# Altium PCB yasaman_najafi_shahrestanaki.PcbDoc
Units mm, origin at the board's own origin, x right, y up, seen from the top; angles counter-clockwise.
Board outline 94.07 x 58.64 mm, 2 copper layers (Top Layer, Bottom Layer); 28 components, 23 nets, 118 pads, 12 vias.
Unrouted connection lines stored in the file: 1.
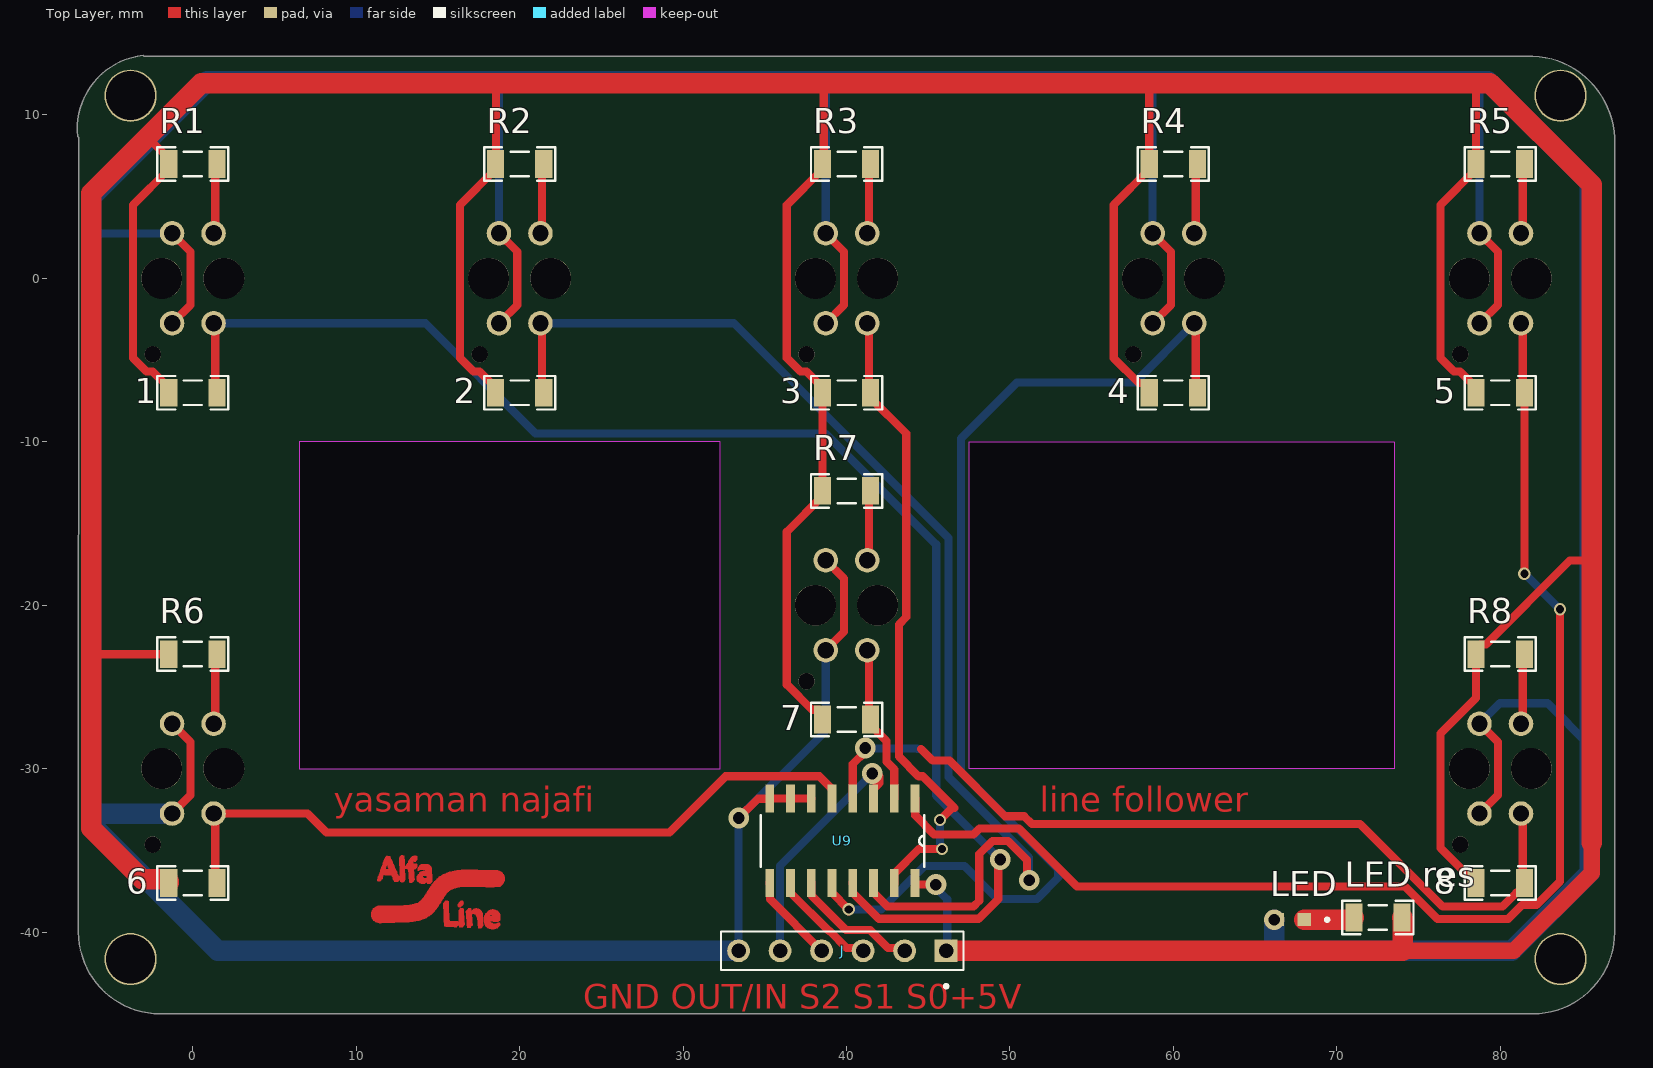
[diagram p0: Top Layer view]
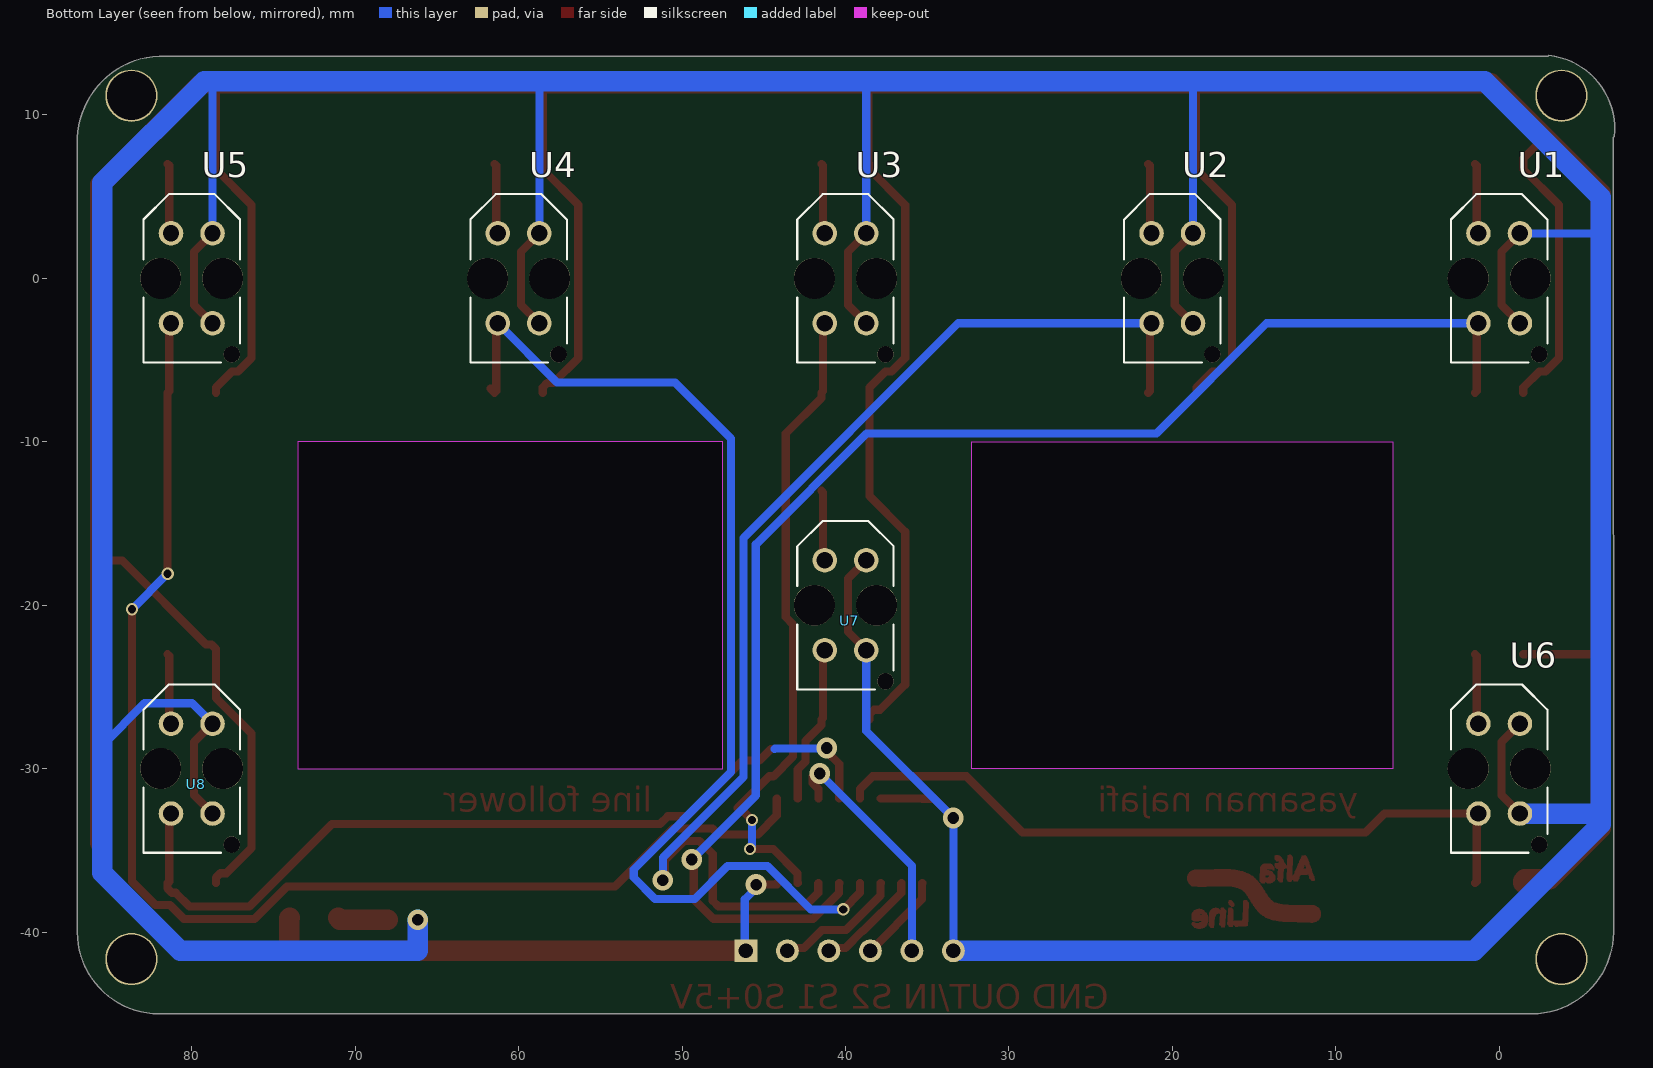
[diagram p1: Bottom Layer view, seen from below]
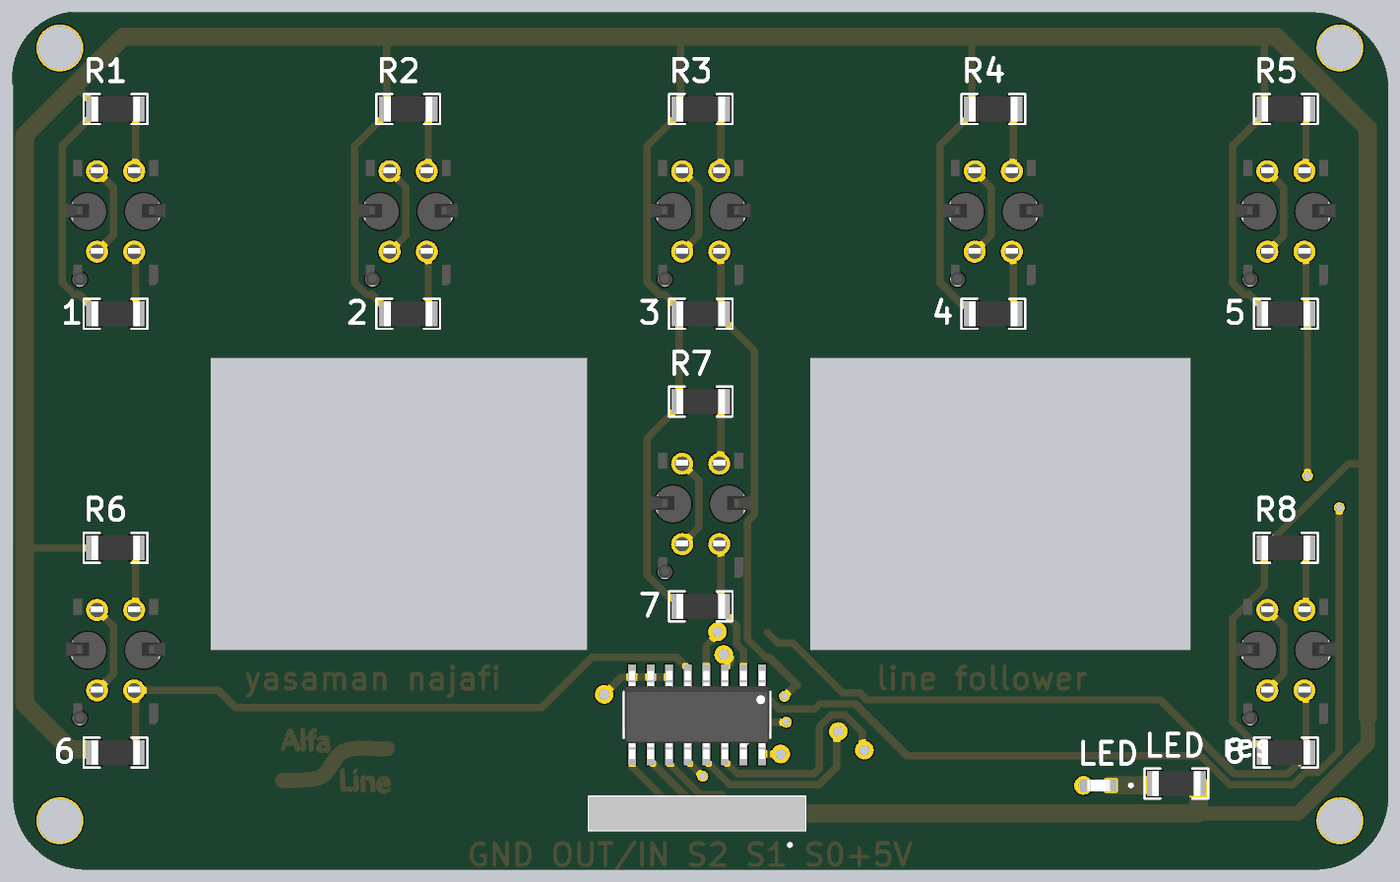
[diagram p2: 3D render of the assembled board from above, using the file's embedded part models]
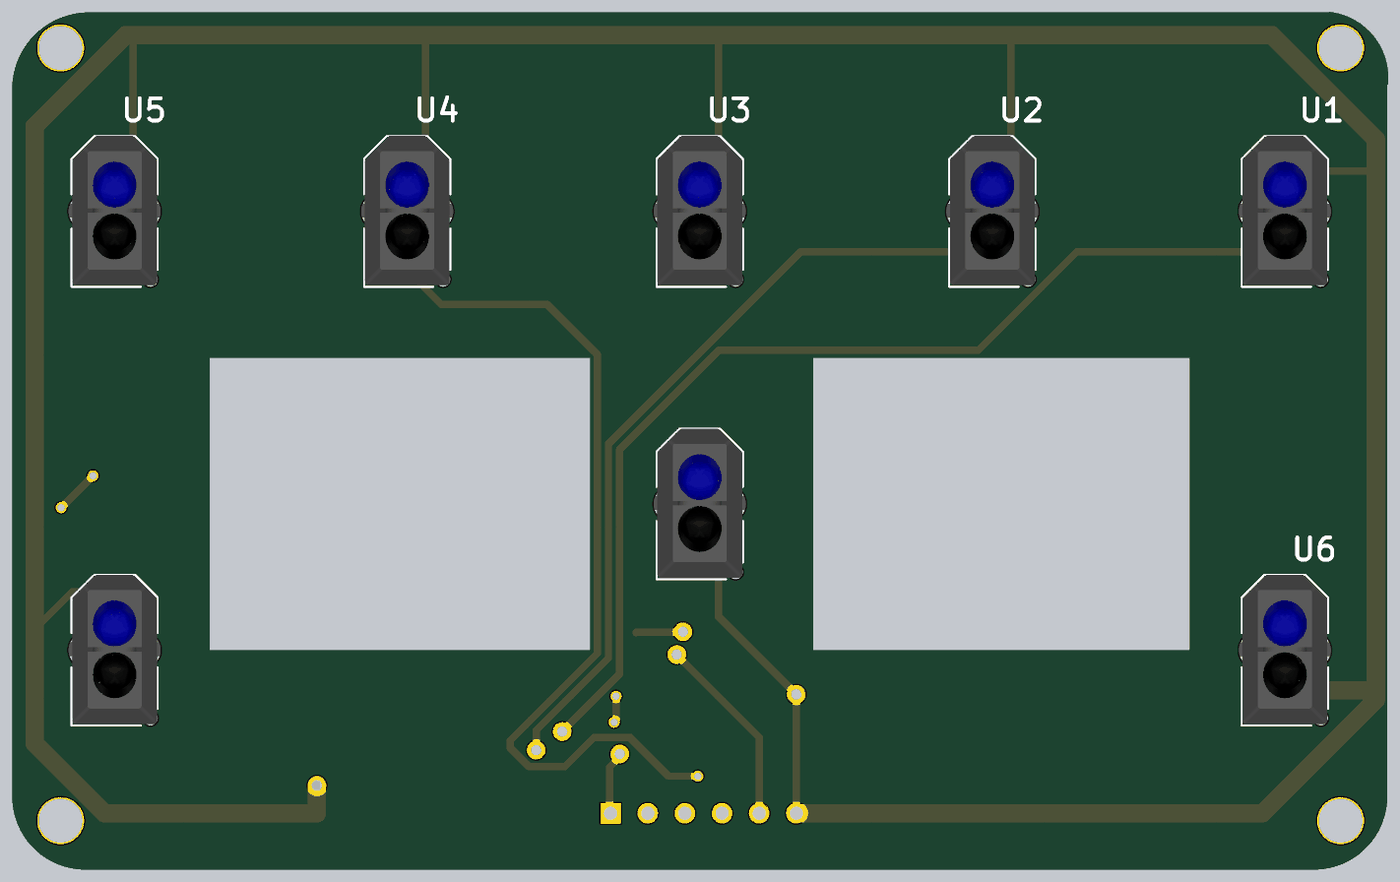
[diagram p3: 3D render of the assembled board from below, using the file's embedded part models]

## Layer stack, top to bottom
Top Solder: solder mask 0.0102, Solder Resist, Dk 3.5
Top Layer: signal copper 0.0356
Dielectric 1: dielectric 0.32, FR-4, Dk 4.8
Bottom Layer: signal copper 0.0356
Bottom Solder: solder mask 0.0102, Solder Resist, Dk 3.5

## Board outline
-7,-40 -6.985,8.636 -7.043,8.675 cw(c-2.54,9.144) -3.04,13.644 -3,13.603 82,13.603 cw(c81.759,8.362) 87,8.603 87,-40.005 87,-40 cw(c82,-40) 82,-45 -2,-45 cw(c-2,-40)
cut-out: 47.498,-10 73.5,-10 73.5,-30 47.498,-30
cut-out: 6.5,-30 32.258,-30 32.258,-10 6.5,-10

## Design rules (kind name [scope] priority, off if disabled: settings)
Clearance [All] p1: gap=0.254 ignorepadtopadclearanceinfootprint=FALSE except(0: Arc-Hole Track-Hole SMDPad-Hole THPad-Hole Via-Hole Fill-Hole Poly-Hole Region-Hole Text-Hole)
PolygonConnect [All] p1: connectstyle=Relief reliefconductorwidth=0.254 reliefentries=4 polygonreliefangle="90 Angle" airgapwidth=0.254
RoutingVias [All] p1: holewidth=0.711 width=1.27 viastyle="Through Hole" minholewidth=0.711 minwidth=1.27 maxholewidth=0.711 maxwidth=1.27
SolderMaskExpansion [All] p1: expansion=0.102 istentingtop=FALSE
Width [All] p1: maxlimit=1.25 minlimit=0.5 preferedwidth=1
30 further rules are at their usual default settings.

## Components (designator, comment, footprint, x,y, rotation, side; value= is the part's Value field where it differs from the comment)
1 "1K" RES1206 0,-7 r180 top
2 "1K" RES1206 20,-7 r180 top
3 "1K" RES1206 40,-7 r180 top
4 "1K" RES1206 60,-7 r180 top
5 "1K" RES1206 80,-7 r180 top
6 "1K" RES1206 0,-37 r180 top
7 "1K" RES1206 40,-27 r180 top
8 "1K" RES1206 80,-37 r180 top
J "103321-6" TE_103321-6 39.746,-41.148 r180 top
LED "" LED_KPT-1608ZGC 67.183,-39.243 r180 top
"LED res" "1K" RES1206 72.517,-39.116 r0 top
R1 "1K" RES1206 0,7 r0 top
R2 "1K" RES1206 20,7 r0 top
R3 "1K" RES1206 40,7 r0 top
R4 "1K" RES1206 60,7 r0 top
R5 "1K" RES1206 80,7 r0 top
R6 "1K" RES1206 0,-23 r0 top
R7 "1K" RES1206 40,-13 r0 top
R8 "1K" RES1206 80,-23 r0 top
U1 "TCRT5000" OPTO_TCRT5000 0,0 r90 bottom
U2 "TCRT5000" OPTO_TCRT5000 20,0 r90 bottom
U3 "TCRT5000" OPTO_TCRT5000 40,0 r90 bottom
U4 "TCRT5000" OPTO_TCRT5000 60,0 r90 bottom
U5 "TCRT5000" OPTO_TCRT5000 80,0 r90 bottom
U6 "TCRT5000" OPTO_TCRT5000 0,-30 r90 bottom
U7 "TCRT5000" OPTO_TCRT5000 40,-20 r90 bottom
U8 "TCRT5000" OPTO_TCRT5000 80,-30 r90 bottom
U9 "74HC4051D" SOIC127P600X175-16N 39.746,-34.417 r270 top

## Footprints (in the part's own frame and the unit in brackets; to place one, negate y for a bottom-side part, rotate by r counter-clockwise, add the part's x,y. Pads: shape width x height; smd on the part's side, far side on the other; paste and mask are expansions set on the pad)
LED_KPT-1608ZGC [mm]
  rect 0.8x0.8 smd: 1(0.825,0) 2(-0.825,0)
  silkscreen extent -2.32,-0.1 -2.13,0.1, body extent -0.8,-0.4 0.8,0.4, height 1.1
OPTO_TCRT5000 [mm]
  round 1.5 hole 1: A(2.75,1.27) CATH(2.75,-1.27) COLL(-2.75,1.27) E(-2.75,-1.27)
  round 1 hole 1 unplated: ""(-4.65,-2.45)
  round 2.5 hole 2.5 unplated: ""(0,-1.9) ""(0,1.9)
  silkscreen extent -5.15,-2.95 5.15,2.95, body extent -5.04,-3.4 5.16,3.4, height 6.7
RES1206 [mm] "Chip Resistor, 2-Leads, Body 3/20x1/60mm, IPC Medium Density DESIGNER:ABBAS BASEREH"
  rect 1.05x1.7 smd: 1(-1.475,0) 2(1.475,0)
  silkscreen extent -2.17,-1.02 2.17,1.02, body extent -1.65,-0.85 1.65,0.85, height 0.94
SOIC127P600X175-16N [mil]
  rect 67x21 smd: 1(-102,175) 2(-102,125) 3(-102,75) 4(-102,25) 5(-102,-25) 6(-102,-75) 7(-102,-125) 8(-102,-175) 9(102,-175) 10(102,-125) 11(102,-75) 12(102,-25) 13(102,25) 14(102,75) 15(102,125) 16(102,175)
  silkscreen extent -62,-197 62,197, body extent -118,-195 118,195, height 69
TE_103321-6 [mm]
  rect 1.398x1.398 hole 0.89: 1(-6.35,0)
  round 1.398 hole 0.89: 2(-3.81,0) 3(-1.27,0) 4(1.27,0) 5(3.81,0) 6(6.35,0)
  silkscreen extent -7.42,-1.17 7.42,2.27, body extent -7.42,-1.17 7.42,1.17, height 10.58

## Part data
1 2 3 4 5 6 7 8 "LED res" R1 R2 R3 R4 R5 R6 R7 R8: library part "RES SMD PACKAGE", "TOTAL SMD RESISTOR PACK", Data=2017-3-10, Desc.="RES SMD PAKAGES", Designer="Abbas Basereh"
J: "Pin 06 MODII HDR SRST B / A .100CL 6 POS", Package=None, Availability=Unavailable, MF="TE Connectivity", Mouser-Purchase-URL=https://snapeda.com/shop?store=Mouser&id=4238467, MP=103321-6, Price=None, SnapEDA_Link=https://www.snapeda.com/parts/103321-6/TE%20Connectivity/view-part/4238467/?ref=snap
LED: library part KPT-1608ZGC, "1.6x0.8mm Smd Chip Led Lamp", Package="0603 Kingbright", Availability="In Stock", Check_prices=https://www.snapeda.com/parts/KPT-1608ZGC/Kingbright/view-part/?ref=eda, MF=Kingbright, MP=KPT-1608ZGC, Price=None, SnapEDA_Link=https://www.snapeda.com/parts/KPT-1608ZGC/Kingbright/view-part/?ref=snap
U1 U2 U3 U4 U5 U6 U7 U8: "950 nm 60 mA Through Hole Reflective Optical Sensor with Transistor Output", Package=None, Availability=Unavailable, MP=TCRT5000, Price=None
U9: "1 Circuit IC Switch 8:1 130Ohm 16-SOIC", Package="SOIC-16 Toshiba", Availability="In Stock", Check_prices=https://www.snapeda.com/parts/74HC4051D/Toshiba/view-part/?ref=eda, MF=Toshiba, MP=74HC4051D, Price=None, Purchase-URL=https://pricing.snapeda.com/search/part/74HC4051D/?ref=eda, SnapEDA_Link=https://www.snapeda.com/parts/74HC4051D/Toshiba/view-part/?ref=snap

## Free pads (board coordinates)
  round 3.2 hole 3: 7(-3.81,11.176) 8(83.693,11.176) 9(83.693,-41.656) 10(-3.81,-41.656)

## Via types
v1: diameter 1.27, hole 0.711, Top Layer to Bottom Layer, 7 vias
v2: diameter 0.75, hole 0.5, Top Layer to Bottom Layer, 5 vias

## Nets (pads, with @x,y where several pads share a name; then routed paths per layer and width w, separated by ;. In a path a pad name is that pad's centre, name@x,y a point inside that pad or via, vN(x,y) a via of type N, cw(c..) or ccw(c..) an arc to the next point about the centre after c; other vN are vias at no path point)
0: 1.1 U1.COLL U9.13 | length 88.2
  Top Layer w0.5: U1.COLL 1.373,-2.853 1.373,-6.898 1.1 ; U9.13 40.398,-37.025 40.398,-37.609 41.98,-39.191 48.083,-39.191 49.288,-37.986 49.288,-35.675 v1(49.403,-35.56)
  Bottom Layer w0.5: U1.COLL 14.23,-2.75 20.976,-9.496 38.706,-9.496 45.486,-16.276 45.486,-31.643 v1(49.403,-35.56)
1: 2.1 U2.COLL U9.14 | length 73.2
  Top Layer w0.5: U2.COLL 21.373,-2.853 21.373,-6.898 2.1 ; U9.14 41.668,-37.025 41.668,-37.609 42.496,-38.437 47.771,-38.437 48.121,-38.087 48.121,-35.231 48.931,-34.421 49.875,-34.421 51.034,-35.58 51.034,-36.683 v1(51.181,-36.83)
  Bottom Layer w0.5: U2.COLL 33.103,-2.75 46.24,-15.887 46.24,-30.521 51.164,-35.445 51.164,-36.813 v1(51.181,-36.83)
2: 3.1 U3.COLL U9.15 | length 39.5
  Top Layer w0.5: U3.COLL 41.372,-2.852 41.372,-6.897 3.1 41.475,-7.325 43.654,-9.504 43.654,-20.727 43.208,-21.173 43.208,-29.265 44.414,-30.471 44.666,-30.471 46.609,-32.414 46.453,-32.414 v2(45.72,-33.147) ; U9.15 42.938,-36.991 42.938,-36.407 44.42,-34.925 v2(45.847,-34.925)
  Bottom Layer w0.5: v2(45.72,-33.147) 45.72,-34.73 45.847,-34.857 v2(45.847,-34.925)
3: 4.1 U4.COLL U9.12 | length 68.7
  Top Layer w0.5: U9.12 39.111,-37.592 v2(40.132,-38.613) v2@40.132,-38.735 ; U4.COLL 61.372,-2.852 61.372,-6.897 4.1 61.475,-6.978 4.1@61.722,-6.731
  Bottom Layer w0.5: v2(40.132,-38.613) 42.122,-38.613 44.778,-35.957 47.209,-35.957 49.221,-37.969 51.653,-37.969 52.953,-36.669 52.953,-36.168 46.994,-30.209 46.994,-9.791 50.419,-6.366 57.654,-6.366 U4.COLL
4: 5.1 U5.COLL U9.1 | length 79.5
  Top Layer w0.5: U9.1 44.208,-31.843 44.208,-32.878 45.356,-34.026 47.777,-34.026 48.136,-33.667 50.557,-33.667 54.101,-37.211 74.175,-37.211 76.165,-39.201 80.488,-39.201 81.334,-38.354 82.209,-38.354 83.654,-36.909 v2(83.654,-20.253) ; U5.COLL 81.372,-2.852 81.372,-6.897 5.1 v2(81.475,-18.074)
  Bottom Layer w0.5: v2(81.475,-18.074) v2(83.654,-20.253)
5: 6.1 U6.COLL U9.5 | length 45
  Top Layer w0.5: 6.1 1.373,-36.898 1.373,-32.853 U6.COLL 7.018,-32.75 8.173,-33.905 29.158,-33.905 32.592,-30.471 38.34,-30.471 39.111,-31.242 U9.5
6: 7.1 U7.COLL U9.2 | length 9.8
  Top Layer w0.5: U7.COLL 41.372,-22.852 41.372,-26.897 7.1 41.475,-27.325 42.454,-28.304 42.454,-29.577 42.922,-30.045 U9.2
7: 8.1 U8.COLL U9.4 | length 52.7
  Top Layer w0.5: U9.4 40.381,-29.714 41.148,-28.947 v1(41.148,-28.739) ; 44.555,-28.793 45.273,-29.51 46.296,-29.51 49.698,-32.913 50.869,-32.913 51.353,-33.397 71.427,-33.397 76.477,-38.447 80.133,-38.447 80.979,-37.6 81.2,-37.6 81.475,-37.325 8.1 81.372,-36.897 81.372,-32.852 U8.COLL
  Bottom Layer w0.5: v1(41.148,-28.739) 41.175,-28.766 44.32,-28.766 44.347,-28.793
+5: 1.2 2.2 3.2 4.2 5.2 6.2 7.2 8.2 "LED res.2" J.1 R1.1 R2.1 R3.1 R4.1 R5.1 R6.1 R7.1 R8.1 U9.16 | length 388.2
  Top Layer w0.5: -6.223,-22.987 -6.21,-23 R6.1 ; -2.73,8.7 -2.73,8.581 -1.475,7.325 R1.1 -1.475,6.675 -3.654,4.496 -3.654,-4.866 -2.827,-5.693 -2.457,-5.693 -1.475,-6.675 1.2 ; 2.2 18.525,-6.675 17.543,-5.693 17.173,-5.693 16.346,-4.866 16.346,4.496 18.525,6.675 R2.1 18.542,7.017 18.542,11.938 ; 7.2 38.525,-26.675 38.25,-26.4 37.88,-26.4 36.346,-24.866 36.346,-15.504 38.525,-13.325 R7.1 3.2 38.525,-6.675 37.543,-5.693 37.173,-5.693 36.346,-4.866 36.346,4.496 38.525,6.675 R3.1 38.608,7.083 38.608,11.938 ; U9.16 44.191,-37.079 44.208,-37.096 v1(45.47,-37.096) ; 4.2 58.525,-6.675 58.25,-6.4 57.88,-6.4 56.346,-4.866 56.346,4.496 58.525,6.675 R4.1 58.525,11.916 58.547,11.938 ; 8.2 78.525,-36.675 78.25,-36.4 77.88,-36.4 76.346,-34.866 76.346,-27.861 78.525,-25.682 R8.1 78.525,-22.675 78.8,-22.4 79.125,-22.4 84.253,-17.272 85.598,-17.272 ; 5.2 78.525,-6.675 77.543,-5.693 77.173,-5.693 76.346,-4.866 76.346,4.496 78.525,6.675 R5.1 78.525,11.85 78.613,11.938
  Top Layer w1: 74.041,-41.148 80.835,-41.148 85.598,-36.385 85.598,-34.544
  Top Layer w1.25: 6.2 -1.475,-36.875 -1.575,-36.775 -3.103,-36.775 -6.223,-33.655 -6.223,-22.987 -6.223,5.207 -2.73,8.7 0.508,11.938 18.542,11.938 38.608,11.938 58.547,11.938 78.613,11.938 79.375,11.938 85.598,5.715 85.598,-17.272 85.598,-34.544 ; J.1 74.041,-41.148 74.041,-39.165 73.992,-39.116
  Bottom Layer w0.5: v1(45.47,-37.096) 45.47,-37.304 46.162,-37.996 46.162,-41.082 J.1
GND: J.6 LED.1 U1.CATH U1.E U2.CATH U2.E U3.CATH U3.E U4.CATH U4.E U5.CATH U5.E U6.CATH U6.E U7.CATH U7.E U8.CATH U8.E U9.6 U9.7 U9.8 | length 376.9
  Top Layer w0.5: U6.E -0.146,-31.626 -0.146,-28.374 U6.CATH ; U1.E -0.146,-1.626 -0.146,1.626 U1.CATH ; U2.E 19.854,-1.626 19.854,1.626 U2.CATH ; v1@33.396,-33.025 v1(33.401,-33.02) 34.577,-31.844 35.284,-31.844 U9.8 ; U9.8 U9.7 U9.6 ; U7.E 39.854,-21.626 39.854,-18.374 U7.CATH ; U3.E 39.854,-1.626 39.854,1.626 U3.CATH ; U4.E 59.854,-1.626 59.854,1.626 U4.CATH ; U8.E 79.854,-31.626 79.854,-28.374 U8.CATH ; U5.E 79.854,-1.626 79.854,1.626 U5.CATH
  Bottom Layer w0.5: -6.223,2.667 -6.14,2.75 U1.CATH ; U2.CATH 18.73,11.872 18.923,12.065 ; J.6 33.396,-33.025 v1(33.401,-33.02) 38.73,-27.691 U7.E ; U3.CATH 38.73,12.06 38.735,12.065 ; 58.674,12.065 58.73,12.009 U4.CATH ; 78.232,12.065 78.73,11.567 U5.CATH ; U8.CATH 79.984,-25.996 82.892,-25.996 85.471,-28.575
  Bottom Layer w1.25: U6.E -5.572,-32.75 -6.223,-33.401 ; J.6 1.524,-41.148 -6.223,-33.401 ; v1(66.167,-39.243) 66.167,-41.148 80.695,-41.148 85.471,-36.372 85.471,-28.575 85.471,5.842 79.248,12.065 78.232,12.065 58.674,12.065 38.735,12.065 18.923,12.065 0.889,12.065 -6.223,4.953 -6.223,2.667 -6.223,-33.401
"NetLED res_1": "LED res.1" LED.2 | length 3.1
  Top Layer w1.25: LED.2 70.942,-39.243 71.042,-39.143 71.042,-39.116
NetR1_2: R1.2 U1.A | length 4.3
  Top Layer w0.5: U1.A 1.372,2.852 1.372,6.898 R1.2
NetR2_2: R2.2 U2.A | length 4.3
  Top Layer w0.5: U2.A 21.372,2.852 21.372,6.898 R2.2
NetR3_2: R3.2 U3.A | length 4.3
  Top Layer w0.5: U3.A 41.372,2.852 41.372,6.898 R3.2
NetR4_2: R4.2 U4.A | length 4.3
  Top Layer w0.5: U4.A 61.372,2.852 61.372,6.898 R4.2
NetR5_2: R5.2 U5.A | length 4.3
  Top Layer w0.5: U5.A 81.372,2.852 81.372,6.898 R5.2
NetR6_2: R6.2 U6.A | length 4.3
  Top Layer w0.5: U6.A 1.372,-27.148 1.372,-23.102 R6.2
NetR7_2: R7.2 U7.A | length 4.3
  Top Layer w0.5: U7.A 41.372,-17.148 41.372,-13.102 R7.2
NetR8_2: R8.2 U8.A | length 4.3
  Top Layer w0.5: U8.A 81.372,-27.148 81.372,-23.102 R8.2
out/in: J.5 U9.3 | length 15.2
  Top Layer w0.5: v1(41.571,-30.297) 41.718,-30.444 41.99,-30.444 42.017,-30.471 42.017,-30.876 41.651,-31.242 U9.3
  Bottom Layer w0.5: J.5 35.936,-35.946 41.571,-30.311 v1(41.571,-30.297)
S0: J.2 U9.11 | length 7.9
  Top Layer w0.5: U9.11 37.858,-37.025 37.858,-37.762 39.974,-39.878 41.447,-39.878 42.545,-40.976 43.384,-40.976 J.2
S1: J.3 U9.10 | length 6.5
  Top Layer w0.5: U9.10 36.588,-37.025 36.588,-37.609 38.924,-39.945 38.974,-39.945 40.005,-40.976 40.844,-40.976 J.3
S2: J.4 U9.9 | length 5.5
  Top Layer w0.5: U9.9 35.318,-37.025 35.318,-37.99 J.4
pads on no net: U1. U2. U3. U4. U5. U6. U7. U8.
copper on no net: | length 592.5
  Top Layer w0.025: 10.922,-39.04 14.376,-39.04 ; 10.922,-39.014 14.427,-39.014 ; 10.922,-38.989 14.453,-38.989 ; 10.922,-38.964 14.503,-38.964 ; 10.922,-38.938 14.529,-38.938 ; 10.922,-38.913 14.58,-38.913 ; 10.922,-38.887 14.605,-38.887 ; 10.922,-38.862 14.63,-38.862 ; 10.922,-38.837 14.656,-38.837 ; 10.922,-38.811 14.681,-38.811 ; 10.922,-38.786 14.707,-38.786 ; 10.947,-39.116 14.275,-39.116 ; 10.947,-39.091 14.3,-39.091 ; 10.947,-39.065 14.351,-39.065 ; 10.947,-38.76 14.732,-38.76 ; 10.947,-38.735 14.757,-38.735 ; 10.947,-38.71 14.783,-38.71 ; 10.973,-39.141 14.199,-39.141 ; 10.973,-38.684 14.808,-38.684 ; 10.973,-38.659 14.808,-38.659 ; 10.998,-39.192 14.097,-39.192 ; 10.998,-39.167 14.148,-39.167 ; 10.998,-38.633 14.834,-38.633 ; 10.998,-38.608 14.859,-38.608 ; 11.024,-39.218 14.021,-39.218 ; 11.024,-38.583 14.884,-38.583 ; 11.049,-39.268 13.843,-39.268 ; 11.049,-39.243 13.945,-39.243 ; 11.049,-38.557 14.91,-38.557 ; 11.074,-38.532 14.91,-38.532 ; 11.1,-39.294 13.767,-39.294 ; 11.1,-38.506 14.935,-38.506 ; 11.125,-39.319 13.64,-39.319 ; 11.151,-39.345 13.487,-39.345 ; 11.151,-38.481 14.961,-38.481 ; 11.201,-39.37 13.233,-39.37 ; 11.201,-38.456 14.986,-38.456 ; 11.252,-38.43 14.986,-38.43 ; 11.278,-36.83 11.506,-36.83 ; 11.278,-36.805 11.532,-36.805 ; 11.278,-36.779 11.532,-36.779 ; 11.303,-39.395 12.37,-39.395 ; 11.303,-36.855 11.481,-36.855 ; 11.303,-36.754 11.557,-36.754 ; 11.303,-36.728 11.582,-36.728 ; 11.303,-36.703 11.608,-36.703 ; 11.328,-38.405 15.011,-38.405 ; 11.328,-36.678 11.608,-36.678 ; 11.328,-36.652 11.608,-36.652 ; 11.328,-36.627 11.633,-36.627 ; 11.354,-36.601 11.633,-36.601 ; 11.354,-36.576 11.633,-36.576 ; 11.379,-36.551 11.659,-36.551 ; 11.379,-36.525 11.659,-36.525 ; 11.379,-36.5 11.659,-36.5 ; 11.405,-39.421 11.532,-39.421 ; 11.405,-36.474 12.548,-36.474 ; 11.405,-36.449 12.548,-36.449 ; 11.405,-36.424 12.522,-36.424 ; 11.43,-36.398 12.522,-36.398 ; 11.43,-36.373 12.522,-36.373 ; 11.43,-36.347 12.497,-36.347 ; 11.455,-36.322 12.497,-36.322 ; 11.455,-36.297 12.471,-36.297 ; 11.455,-36.271 12.471,-36.271 ; 11.481,-36.246 12.446,-36.246 ; 11.481,-36.22 12.446,-36.22 ; 11.481,-36.195 12.421,-36.195 ; 11.506,-36.17 12.421,-36.17 ; 11.506,-36.144 11.786,-36.144 ; 11.506,-36.119 11.786,-36.119 ; 11.532,-36.093 11.811,-36.093 ; 11.532,-36.068 11.811,-36.068 ; 11.532,-36.043 11.811,-36.043 ; 11.557,-38.379 15.037,-38.379 ; 11.557,-36.017 11.836,-36.017 ; 11.557,-35.992 11.836,-35.992 ; 11.557,-35.966 11.836,-35.966 ; 11.582,-35.941 11.836,-35.941 ; 11.582,-35.916 11.862,-35.916 ; 11.608,-35.89 11.862,-35.89 ; 11.608,-35.865 11.862,-35.865 ; 11.608,-35.839 12.268,-35.839 ; 11.633,-35.814 12.268,-35.814 ; 11.633,-35.789 12.243,-35.789 ; 11.633,-35.763 12.243,-35.763 ; 11.659,-35.738 12.217,-35.738 ; 11.659,-35.712 12.217,-35.712 ; 11.659,-35.687 12.217,-35.687 ; 11.684,-35.662 12.192,-35.662 ; 11.684,-35.636 12.192,-35.636 ; 11.684,-35.611 12.167,-35.611 ; 11.709,-35.585 12.167,-35.585 ; 11.709,-35.56 12.141,-35.56 ; 11.709,-35.535 12.141,-35.535 ; 11.735,-36.5 12.573,-36.5 ; 11.735,-35.509 12.116,-35.509 ; 11.735,-35.484 12.116,-35.484 ; 11.76,-35.458 12.116,-35.458 ; 11.786,-35.433 12.09,-35.433 ; 11.811,-35.408 12.09,-35.408 ; 11.811,-35.382 12.065,-35.382 ; 11.836,-35.357 12.065,-35.357 ; 11.862,-35.331 11.887,-35.331 ; 11.887,-35.89 12.294,-35.89 ; 11.887,-35.865 12.294,-35.865 ; 11.913,-35.941 12.319,-35.941 ; 11.913,-35.916 12.319,-35.916 ; 11.938,-36.017 12.344,-36.017 ; 11.938,-35.992 12.344,-35.992 ; 11.938,-35.966 12.319,-35.966 ; 11.963,-36.068 12.37,-36.068 ; 11.963,-36.043 12.37,-36.043 ; 11.989,-36.119 12.395,-36.119 ; 11.989,-36.093 12.395,-36.093 ; 12.014,-36.144 12.421,-36.144 ; 12.167,-36.551 12.598,-36.551 ; 12.167,-36.525 12.573,-36.525 ; 12.192,-36.601 12.624,-36.601 ; 12.192,-36.576 12.598,-36.576 ; 12.217,-36.652 12.624,-36.652 ; 12.217,-36.627 12.624,-36.627 ; 12.243,-36.728 13.005,-36.728 ; 12.243,-36.703 12.649,-36.703 ; 12.243,-36.678 12.649,-36.678 ; 12.268,-36.779 12.649,-36.779 ; 12.268,-36.754 13.005,-36.754 ; 12.294,-36.83 12.598,-36.83 ; 12.294,-36.805 12.624,-36.805 ; 12.319,-36.881 12.573,-36.881 ; 12.319,-36.855 12.573,-36.855 ; 12.344,-36.906 12.548,-36.906 ; 12.624,-35.916 12.954,-35.916 ; 12.624,-35.89 12.954,-35.89 ; 12.624,-35.865 12.954,-35.865 ; 12.624,-35.839 12.954,-35.839 ; 12.624,-35.814 12.954,-35.814 ; 12.624,-35.789 12.954,-35.789 ; 12.624,-35.763 12.954,-35.763 ; 12.624,-35.738 12.954,-35.738 ; 12.624,-35.712 12.954,-35.712 ; 12.624,-35.687 12.954,-35.687 ; 12.624,-35.662 12.954,-35.662 ; 12.624,-35.636 12.954,-35.636 ; 12.624,-35.611 12.954,-35.611 ; 12.624,-35.585 12.954,-35.585 ; 12.624,-35.56 12.954,-35.56 ; 12.624,-35.535 12.954,-35.535 ; 12.624,-35.509 12.929,-35.509 ; 12.624,-35.484 12.929,-35.484 ; 12.624,-35.458 12.929,-35.458 ; 12.649,-36.347 12.979,-36.347 ; 12.649,-36.322 12.979,-36.322 ; 12.649,-36.297 12.979,-36.297 ; 12.649,-36.271 12.979,-36.271 ; 12.649,-36.246 12.979,-36.246 ; 12.649,-36.22 12.979,-36.22 ; 12.649,-36.195 12.979,-36.195 ; 12.649,-36.17 12.979,-36.17 ; 12.649,-36.144 12.979,-36.144 ; 12.649,-36.119 12.979,-36.119 ; 12.649,-36.093 12.979,-36.093 ; 12.649,-36.068 12.979,-36.068 ; 12.649,-36.043 12.979,-36.043 ; 12.649,-36.017 12.979,-36.017 ; 12.649,-35.992 12.979,-35.992 ; 12.649,-35.966 12.979,-35.966 ; 12.649,-35.941 12.954,-35.941 ; 12.649,-35.433 12.929,-35.433 ; 12.675,-36.805 12.979,-36.805 ; 12.675,-36.779 13.005,-36.779 ; 12.675,-36.703 13.005,-36.703 ; 12.675,-36.678 13.005,-36.678 ; 12.675,-36.652 13.005,-36.652 ; 12.675,-36.627 13.005,-36.627 ; 12.675,-36.601 13.005,-36.601 ; 12.675,-36.576 13.005,-36.576 ; 12.675,-36.551 13.005,-36.551 ; 12.675,-36.525 13.005,-36.525 ; 12.675,-36.5 13.005,-36.5 ; 12.675,-36.474 13.005,-36.474 ; 12.675,-36.449 13.005,-36.449 ; 12.675,-36.424 13.005,-36.424 ; 12.675,-36.398 13.005,-36.398 ; 12.675,-36.373 12.979,-36.373 ; 12.675,-35.408 12.929,-35.408 ; 12.675,-35.382 12.929,-35.382 ; 12.7,-36.906 12.903,-36.906 ; 12.7,-36.881 12.929,-36.881 ; 12.7,-36.855 12.929,-36.855 ; 12.7,-36.83 12.954,-36.83 ; 12.7,-35.357 12.929,-35.357 ; 12.725,-35.331 12.929,-35.331 ; 12.751,-36.932 12.878,-36.932 ; 12.751,-35.306 12.852,-35.306 ; 12.903,-38.354 15.037,-38.354 ; 13.005,-36.093 13.64,-36.093 ; 13.005,-36.068 13.665,-36.068 ; 13.005,-36.043 13.691,-36.043 ; 13.005,-36.017 13.691,-36.017 ; 13.005,-35.992 13.716,-35.992 ; 13.005,-35.966 13.741,-35.966 ; 13.03,-35.941 13.741,-35.941 ; 13.056,-35.916 13.741,-35.916 ; 13.056,-35.89 13.741,-35.89 ; 13.081,-35.865 13.741,-35.865 ; 13.106,-35.839 13.741,-35.839 ; 13.132,-36.119 13.614,-36.119 ; 13.132,-35.814 13.691,-35.814 ; 13.132,-35.789 13.487,-35.789 ; 13.183,-36.271 13.513,-36.271 ; 13.183,-36.246 13.513,-36.246 ; 13.183,-36.22 13.513,-36.22 ; 13.183,-36.195 13.513,-36.195 ; 13.183,-36.17 13.513,-36.17 ; 13.183,-36.144 13.513,-36.144 ; 13.183,-35.763 13.487,-35.763 ; 13.183,-35.738 13.487,-35.738 ; 13.183,-35.712 13.487,-35.712 ; 13.183,-35.687 13.487,-35.687 ; 13.183,-35.662 13.487,-35.662 ; 13.208,-36.703 13.538,-36.703 ; 13.208,-36.678 13.538,-36.678 ; 13.208,-36.652 13.538,-36.652 ; 13.208,-36.627 13.538,-36.627 ; 13.208,-36.601 13.538,-36.601 ; 13.208,-36.576 13.538,-36.576 ; 13.208,-36.551 13.538,-36.551 ; 13.208,-36.525 13.538,-36.525 ; 13.208,-36.5 13.538,-36.5 ; 13.208,-36.474 13.538,-36.474 ; 13.208,-36.449 13.538,-36.449 ; 13.208,-36.424 13.538,-36.424 ; 13.208,-36.398 13.538,-36.398 ; 13.208,-36.373 13.538,-36.373 ; 13.208,-36.347 13.538,-36.347 ; 13.208,-36.322 13.538,-36.322 ; 13.208,-36.297 13.538,-36.297 ; 13.208,-35.636 13.64,-35.636 ; 13.208,-35.611 13.665,-35.611 ; 13.233,-36.932 13.437,-36.932 ; 13.233,-36.906 13.462,-36.906 ; 13.233,-36.881 13.487,-36.881 ; 13.233,-36.855 13.513,-36.855 ; 13.233,-36.83 13.513,-36.83 ; 13.233,-36.805 13.538,-36.805 ; 13.233,-36.779 13.564,-36.779 ; 13.233,-36.754 13.564,-36.754 ; 13.233,-36.728 13.564,-36.728 ; 13.233,-35.585 13.691,-35.585 ; 13.259,-38.329 15.062,-38.329 ; 13.259,-36.957 13.411,-36.957 ; 13.259,-35.56 13.716,-35.56 ; 13.284,-35.535 13.741,-35.535 ; 13.31,-35.509 13.741,-35.509 ; 13.31,-35.484 13.741,-35.484 ; 13.335,-35.458 13.741,-35.458 ; 13.36,-35.433 13.741,-35.433 ; 13.386,-35.408 13.741,-35.408 ; 13.411,-35.382 13.741,-35.382 ; 13.437,-38.303 15.088,-38.303 ; 13.437,-35.357 13.741,-35.357 ; 13.513,-35.331 13.665,-35.331 ; 13.538,-38.278 15.088,-38.278 ; 13.538,-35.662 13.64,-35.662 ; 13.64,-38.252 15.113,-38.252 ; 13.716,-38.227 15.138,-38.227 ; 13.716,-36.805 14.656,-36.805 ; 13.716,-36.779 14.656,-36.779 ; 13.716,-36.754 14.656,-36.754 ; 13.716,-36.728 14.656,-36.728 ; 13.716,-36.703 14.656,-36.703 ; 13.716,-36.678 14.122,-36.678 ; 13.716,-36.652 14.097,-36.652 ; 13.716,-36.627 14.072,-36.627 ; 13.716,-36.601 14.046,-36.601 ; 13.741,-36.855 14.656,-36.855 ; 13.741,-36.83 14.656,-36.83 ; 13.741,-36.576 14.046,-36.576 ; 13.741,-36.551 14.072,-36.551 ; 13.767,-36.881 14.656,-36.881 ; 13.767,-36.525 14.656,-36.525 ; 13.767,-36.5 14.656,-36.5 ; 13.767,-36.22 13.843,-36.22 ; 13.767,-36.195 13.868,-36.195 ; 13.767,-36.17 13.945,-36.17 ; 13.767,-36.144 14.605,-36.144 ; 13.767,-36.119 14.605,-36.119 ; 13.767,-36.093 14.605,-36.093 ; 13.767,-36.068 14.605,-36.068 ; 13.792,-38.202 15.138,-38.202 ; 13.792,-36.906 14.326,-36.906 ; 13.792,-36.474 14.656,-36.474 ; 13.792,-36.043 14.58,-36.043 ; 13.818,-38.176 15.164,-38.176 ; 13.818,-36.932 14.3,-36.932 ; 13.818,-36.449 14.656,-36.449 ; 13.818,-36.017 14.58,-36.017 ; 13.818,-35.992 14.554,-35.992 ; 13.843,-36.957 14.275,-36.957 ; 13.843,-36.424 14.63,-36.424 ; 13.843,-35.966 14.554,-35.966 ; 13.868,-38.151 15.189,-38.151 ; 13.868,-36.398 14.63,-36.398 ; 13.868,-36.373 14.63,-36.373 ; 13.868,-35.941 14.529,-35.941 ; 13.894,-38.125 15.189,-38.125 ; 13.894,-36.982 14.224,-36.982 ; 13.894,-36.347 14.63,-36.347 ; 13.894,-35.916 14.503,-35.916 ; 13.919,-38.1 15.215,-38.1 ; 13.919,-36.322 14.63,-36.322 ; 13.919,-35.89 14.478,-35.89 ; 13.945,-38.075 15.215,-38.075 ; 13.945,-36.297 14.63,-36.297 ; 13.97,-38.049 15.24,-38.049 ; 13.97,-37.008 14.199,-37.008 ; 13.97,-35.865 14.402,-35.865 ; 13.995,-38.024 15.265,-38.024 ; 13.995,-36.271 14.63,-36.271 ; 14.021,-37.998 15.265,-37.998 ; 14.046,-37.973 15.291,-37.973 ; 14.046,-35.839 14.326,-35.839 ; 14.072,-37.948 15.316,-37.948 ; 14.072,-37.922 15.316,-37.922 ; 14.097,-37.897 15.342,-37.897 ; 14.097,-36.246 14.63,-36.246 ; 14.122,-37.871 15.342,-37.871 ; 14.148,-37.846 15.367,-37.846 ; 14.148,-37.821 15.392,-37.821 ; 14.173,-37.795 15.392,-37.795 ; 14.199,-37.77 15.418,-37.77 ; 14.199,-37.744 15.443,-37.744 ; 14.199,-36.17 14.63,-36.17 ; 14.224,-37.719 15.443,-37.719 ; 14.224,-36.195 14.63,-36.195 ; 14.249,-37.694 15.469,-37.694 ; 14.249,-37.668 15.494,-37.668 ; 14.249,-36.22 14.63,-36.22 ; 14.275,-37.643 15.519,-37.643 ; 14.3,-37.617 15.519,-37.617 ; 14.3,-37.592 15.545,-37.592 ; 14.326,-37.567 15.57,-37.567 ; 14.326,-36.678 14.656,-36.678 ; 14.326,-36.652 14.656,-36.652 ; 14.326,-36.627 14.656,-36.627 ; 14.326,-36.601 14.656,-36.601 ; 14.326,-36.576 14.656,-36.576 ; 14.326,-36.551 14.656,-36.551 ; 14.351,-37.541 15.596,-37.541 ; 14.351,-37.516 15.621,-37.516 ; 14.351,-37.008 14.529,-37.008 ; 14.351,-36.982 14.554,-36.982 ; 14.351,-36.957 14.58,-36.957 ; 14.351,-36.932 14.605,-36.932 ; 14.351,-36.906 14.63,-36.906 ; 14.376,-37.49 15.646,-37.49 ; 14.376,-37.465 15.672,-37.465 ; 14.402,-37.44 15.723,-37.44 ; 14.427,-37.414 15.748,-37.414 ; 14.427,-37.389 15.799,-37.389 ; 14.453,-37.363 15.85,-37.363 ; 14.478,-37.338 15.9,-37.338 ; 14.478,-37.313 15.977,-37.313 ; 14.503,-37.287 16.078,-37.287 ; 14.529,-37.262 16.18,-37.262 ; 14.529,-37.236 16.332,-37.236 ; 14.554,-37.211 16.688,-37.211 ; 14.58,-37.186 18.796,-37.186 ; 14.58,-37.16 18.847,-37.16 ; 14.605,-37.135 18.872,-37.135 ; 14.63,-37.109 18.898,-37.109 ; 14.63,-37.084 18.923,-37.084 ; 14.656,-37.059 18.948,-37.059 ; 14.681,-37.033 18.974,-37.033 ; 14.707,-37.008 18.999,-37.008 ; 14.707,-36.982 18.999,-36.982 ; 14.732,-36.957 19.025,-36.957 ; 14.757,-36.932 19.025,-36.932 ; 14.783,-36.906 19.05,-36.906 ; 14.808,-36.881 19.05,-36.881 ; 14.834,-36.855 19.05,-36.855 ; 14.859,-36.83 19.075,-36.83 ; 14.884,-36.805 19.075,-36.805 ; 14.91,-36.779 19.075,-36.779 ; 14.935,-36.754 19.075,-36.754 ; 14.961,-36.728 19.075,-36.728 ; 14.986,-36.703 19.075,-36.703 ; 15.011,-36.678 19.075,-36.678 ; 15.037,-36.652 19.075,-36.652 ; 15.062,-36.627 19.075,-36.627 ; 15.113,-36.601 19.05,-36.601 ; 15.164,-36.576 19.05,-36.576 ; 15.189,-36.551 19.05,-36.551 ; 15.24,-36.525 19.05,-36.525 ; 15.265,-36.5 19.025,-36.5 ; 15.316,-38.532 15.672,-38.532 ; 15.316,-38.506 15.672,-38.506 ; 15.316,-38.481 15.672,-38.481 ; 15.316,-38.456 15.672,-38.456 ; 15.316,-38.43 15.646,-38.43 ; 15.316,-38.405 15.646,-38.405 ; 15.316,-38.379 15.646,-38.379 ; 15.316,-38.354 15.646,-38.354 ; 15.316,-38.329 15.646,-38.329 ; 15.316,-38.303 15.646,-38.303 ; 15.316,-38.278 15.646,-38.278 ; 15.316,-38.252 15.646,-38.252 ; 15.316,-36.474 19.025,-36.474 ; 15.342,-38.964 15.697,-38.964 ; 15.342,-38.938 15.697,-38.938 ; 15.342,-38.913 15.697,-38.913 ; 15.342,-38.887 15.697,-38.887 ; 15.342,-38.862 15.697,-38.862 ; 15.342,-38.837 15.672,-38.837 ; 15.342,-38.811 15.672,-38.811 ; 15.342,-38.786 15.672,-38.786 ; 15.342,-38.76 15.672,-38.76 ; 15.342,-38.735 15.672,-38.735 ; 15.342,-38.71 15.672,-38.71 ; 15.342,-38.684 15.672,-38.684 ; 15.342,-38.659 15.672,-38.659 ; 15.342,-38.633 15.672,-38.633 ; 15.342,-38.608 15.672,-38.608 ; 15.342,-38.583 15.672,-38.583 ; 15.342,-38.557 15.672,-38.557 ; 15.342,-38.227 15.646,-38.227 ; 15.367,-39.37 16.612,-39.37 ; 15.367,-39.345 16.205,-39.345 ; 15.367,-39.319 15.723,-39.319 ; 15.367,-39.294 15.723,-39.294 ; 15.367,-39.268 15.723,-39.268 ; 15.367,-39.243 15.697,-39.243 ; 15.367,-39.218 15.697,-39.218 ; 15.367,-39.192 15.697,-39.192 ; 15.367,-39.167 15.697,-39.167 ; 15.367,-39.141 15.697,-39.141 ; 15.367,-39.116 15.697,-39.116 ; 15.367,-39.091 15.697,-39.091 ; 15.367,-39.065 15.697,-39.065 ; 15.367,-39.04 15.697,-39.04 ; 15.367,-39.014 15.697,-39.014 ; 15.367,-38.989 15.697,-38.989 ; 15.367,-38.202 15.646,-38.202 ; 15.367,-36.449 18.999,-36.449 ; 15.392,-39.624 16.18,-39.624 ; 15.392,-39.599 16.205,-39.599 ; 15.392,-39.573 16.231,-39.573 ; 15.392,-39.548 16.256,-39.548 ; 15.392,-39.522 16.281,-39.522 ; 15.392,-39.497 16.281,-39.497 ; 15.392,-39.472 16.637,-39.472 ; 15.392,-39.446 16.637,-39.446 ; 15.392,-39.421 16.637,-39.421 ; 15.392,-39.395 16.612,-39.395 ; 15.392,-38.176 15.646,-38.176 ; 15.418,-38.151 15.646,-38.151 ; 15.418,-38.125 15.646,-38.125 ; 15.418,-36.424 18.974,-36.424 ; 15.443,-38.1 15.596,-38.1 ; 15.469,-39.649 16.154,-39.649 ; 15.494,-36.398 18.974,-36.398 ; 15.545,-36.373 18.948,-36.373 ; 15.621,-36.347 18.898,-36.347 ; 15.697,-36.322 18.872,-36.322 ; 15.773,-36.297 18.847,-36.297 ; 15.875,-36.271 18.796,-36.271 ; 16.002,-39.675 16.154,-39.675 ; 16.002,-36.246 18.745,-36.246 ; 16.154,-36.22 18.669,-36.22 ; 16.205,-38.405 16.434,-38.405 ; 16.205,-38.379 16.459,-38.379 ; 16.205,-38.354 16.485,-38.354 ; 16.205,-38.329 16.51,-38.329 ; 16.205,-38.303 16.535,-38.303 ; 16.231,-38.43 16.408,-38.43 ; 16.231,-38.278 16.561,-38.278 ; 16.256,-39.065 16.612,-39.065 ; 16.256,-39.04 16.612,-39.04 ; 16.256,-39.014 16.612,-39.014 ; 16.256,-38.989 16.586,-38.989 ; 16.256,-38.964 16.586,-38.964 ; 16.256,-38.938 16.586,-38.938 ; 16.256,-38.913 16.586,-38.913 ; 16.256,-38.887 16.586,-38.887 ; 16.256,-38.862 16.586,-38.862 ; 16.256,-38.837 16.586,-38.837 ; 16.256,-38.811 16.586,-38.811 ; 16.256,-38.786 16.586,-38.786 ; 16.256,-38.76 16.586,-38.76 ; 16.256,-38.735 16.586,-38.735 ; 16.256,-38.71 16.586,-38.71 ; 16.256,-38.684 16.586,-38.684 ; 16.256,-38.456 16.408,-38.456 ; 16.256,-38.252 16.561,-38.252 ; 16.281,-39.345 16.612,-39.345 ; 16.281,-39.319 16.612,-39.319 ; 16.281,-39.294 16.612,-39.294 ; 16.281,-39.268 16.612,-39.268 ; 16.281,-39.243 16.612,-39.243 ; 16.281,-39.218 16.612,-39.218 ; 16.281,-39.192 16.612,-39.192 ; 16.281,-39.167 16.612,-39.167 ; 16.281,-39.141 16.612,-39.141 ; 16.281,-39.116 16.612,-39.116 ; 16.281,-39.091 16.612,-39.091 ; 16.281,-38.659 16.586,-38.659 ; 16.281,-38.227 16.561,-38.227 ; 16.281,-38.202 16.586,-38.202 ; 16.307,-39.675 16.51,-39.675 ; 16.307,-39.649 16.535,-39.649 ; 16.307,-39.624 16.561,-39.624 ; 16.307,-39.599 16.561,-39.599 ; 16.307,-39.573 16.586,-39.573 ; 16.307,-39.548 16.612,-39.548 ; 16.307,-39.522 16.637,-39.522 ; 16.307,-39.497 16.637,-39.497 ; 16.307,-38.633 16.586,-38.633 ; 16.307,-38.176 16.561,-38.176 ; 16.332,-38.608 16.586,-38.608 ; 16.332,-38.583 16.561,-38.583 ; 16.332,-38.151 16.561,-38.151 ; 16.358,-38.557 16.561,-38.557 ; 16.358,-38.125 16.535,-38.125 ; 16.383,-38.532 16.485,-38.532 ; 16.383,-38.1 16.51,-38.1 ; 16.434,-36.195 17.424,-36.195 ; 16.713,-38.786 17.704,-38.786 ; 16.713,-38.76 17.678,-38.76 ; 16.713,-38.735 17.678,-38.735 ; 16.739,-39.167 17.094,-39.167 ; 16.739,-39.141 17.094,-39.141 ; 16.739,-39.116 17.094,-39.116 ; 16.739,-39.091 17.094,-39.091 ; 16.739,-39.065 17.069,-39.065 ; 16.739,-39.04 17.069,-39.04 ; 16.739,-39.014 17.069,-39.014 ; 16.739,-38.989 17.069,-38.989 ; 16.739,-38.964 17.069,-38.964 ; 16.739,-38.938 17.069,-38.938 ; 16.739,-38.913 17.069,-38.913 ; 16.739,-38.887 17.094,-38.887 ; 16.739,-38.862 17.729,-38.862 ; 16.739,-38.837 17.704,-38.837 ; 16.739,-38.811 17.704,-38.811 ; 16.739,-38.71 17.653,-38.71 ; 16.764,-39.573 17.094,-39.573 ; 16.764,-39.548 17.12,-39.548 ; 16.764,-39.522 17.12,-39.522 ; 16.764,-39.497 17.12,-39.497 ; 16.764,-39.472 17.094,-39.472 ; 16.764,-39.446 17.094,-39.446 ; 16.764,-39.421 17.094,-39.421 ; 16.764,-39.395 17.094,-39.395 ; 16.764,-39.37 17.094,-39.37 ; 16.764,-39.345 17.094,-39.345 ; 16.764,-39.319 17.094,-39.319 ; 16.764,-39.294 17.094,-39.294 ; 16.764,-39.268 17.094,-39.268 ; 16.764,-39.243 17.094,-39.243 ; 16.764,-39.218 17.094,-39.218 ; 16.764,-39.192 17.094,-39.192 ; 16.764,-38.684 17.043,-38.684 ; 16.764,-38.659 17.043,-38.659 ; 16.789,-39.7 16.993,-39.7 ; 16.789,-39.675 16.993,-39.675 ; 16.789,-39.649 17.018,-39.649 ; 16.789,-39.624 17.043,-39.624 ; 16.789,-39.599 17.069,-39.599 ; 16.789,-38.633 17.043,-38.633 ; 16.815,-38.608 17.043,-38.608 ; 16.84,-38.583 17.043,-38.583 ; 16.866,-38.557 16.993,-38.557 ; 17.069,-38.684 17.628,-38.684 ; 17.094,-38.659 17.602,-38.659 ; 17.12,-38.633 17.577,-38.633 ; 17.145,-38.608 17.551,-38.608 ; 17.17,-37.211 18.72,-37.211 ; 17.196,-38.583 17.501,-38.583 ; 17.221,-38.887 17.729,-38.887 ; 17.297,-38.913 17.729,-38.913 ; 17.323,-38.938 17.729,-38.938 ; 17.323,-38.557 17.374,-38.557 ; 17.348,-38.989 17.729,-38.989 ; 17.348,-38.964 17.729,-38.964 ; 17.374,-39.065 17.729,-39.065 ; 17.374,-39.04 17.729,-39.04 ; 17.374,-39.014 17.729,-39.014 ; 17.399,-39.218 17.755,-39.218 ; 17.399,-39.192 17.755,-39.192 ; 17.399,-39.167 17.755,-39.167 ; 17.399,-39.141 17.755,-39.141 ; 17.399,-39.116 17.755,-39.116 ; 17.399,-39.091 17.729,-39.091 ; 17.424,-39.599 17.755,-39.599 ; 17.424,-39.573 17.78,-39.573 ; 17.424,-39.548 17.78,-39.548 ; 17.424,-39.522 17.78,-39.522 ; 17.424,-39.497 17.78,-39.497 ; 17.424,-39.472 17.755,-39.472 ; 17.424,-39.446 17.755,-39.446 ; 17.424,-39.421 17.755,-39.421 ; 17.424,-39.395 17.755,-39.395 ; 17.424,-39.37 17.755,-39.37 ; 17.424,-39.345 17.755,-39.345 ; 17.424,-39.319 17.755,-39.319 ; 17.424,-39.294 17.755,-39.294 ; 17.424,-39.268 17.755,-39.268 ; 17.424,-39.243 17.755,-39.243 ; 17.45,-39.726 17.653,-39.726 ; 17.45,-39.7 17.678,-39.7 ; 17.45,-39.675 17.704,-39.675 ; 17.45,-39.649 17.704,-39.649 ; 17.45,-39.624 17.729,-39.624 ; 17.602,-39.751 17.628,-39.751 ; 17.805,-39.37 18.212,-39.37 ; 17.805,-39.345 18.212,-39.345 ; 17.805,-39.319 18.72,-39.319 ; 17.805,-39.294 18.745,-39.294 ; 17.805,-39.268 18.771,-39.268 ; 17.805,-39.243 18.796,-39.243 ; 17.805,-39.218 18.796,-39.218 ; 17.805,-39.192 18.821,-39.192 ; 17.805,-39.167 18.821,-39.167 ; 17.805,-39.141 18.821,-39.141 ; 17.805,-39.116 18.821,-39.116 ; 17.805,-39.091 18.821,-39.091 ; 17.831,-39.446 18.313,-39.446 ; 17.831,-39.421 18.263,-39.421 ; 17.831,-39.395 18.237,-39.395 ; 17.831,-39.065 18.821,-39.065 ; 17.831,-39.04 18.821,-39.04 ; 17.831,-39.014 18.313,-39.014 ; 17.856,-39.522 18.796,-39.522 ; 17.856,-39.497 18.796,-39.497 ; 17.856,-39.472 18.364,-39.472 ; 17.856,-38.989 18.136,-38.989 ; 17.856,-38.964 18.136,-38.964 ; 17.882,-39.573 18.771,-39.573 ; 17.882,-39.548 18.796,-39.548 ; 17.882,-38.938 18.161,-38.938 ; 17.907,-39.599 18.771,-39.599 ; 17.907,-38.913 18.796,-38.913 ; 17.907,-38.887 18.771,-38.887 ; 17.932,-39.649 18.72,-39.649 ; 17.932,-39.624 18.745,-39.624 ; 17.932,-38.862 18.771,-38.862 ; 17.932,-37.236 18.44,-37.236 ; 17.958,-38.837 18.745,-38.837 ; 17.983,-39.675 18.694,-39.675 ; 17.983,-38.811 18.745,-38.811 ; 18.009,-39.7 18.669,-39.7 ; 18.009,-38.786 18.72,-38.786 ; 18.034,-39.726 18.644,-39.726 ; 18.034,-38.76 18.694,-38.76 ; 18.059,-38.735 18.694,-38.735 ; 18.085,-39.751 18.593,-39.751 ; 18.085,-38.71 18.644,-38.71 ; 18.11,-38.684 18.618,-38.684 ; 18.136,-39.776 18.542,-39.776 ; 18.136,-38.659 18.567,-38.659 ; 18.186,-38.633 18.517,-38.633 ; 18.263,-39.802 18.44,-39.802 ; 18.313,-38.938 18.796,-38.938 ; 18.313,-38.608 18.39,-38.608 ; 18.364,-38.964 18.796,-38.964 ; 18.39,-39.345 18.694,-39.345 ; 18.39,-38.989 18.821,-38.989 ; 18.415,-39.014 18.821,-39.014 ; 18.593,-39.472 18.771,-39.472 ; 18.669,-39.446 18.771,-39.446 ; 18.72,-39.421 18.771,-39.421

## Other copper
Top Layer:
  text "yasaman najafi" at 8.636,-32.639 h1.52
  text "line follower" at 51.816,-32.639 h1.52
  text "GND OUT/IN S2 S1 S0+5V" at 23.876,-44.704 h1.5